# EAGLE board esp-4relay-board (EAGLE 7.7.0)
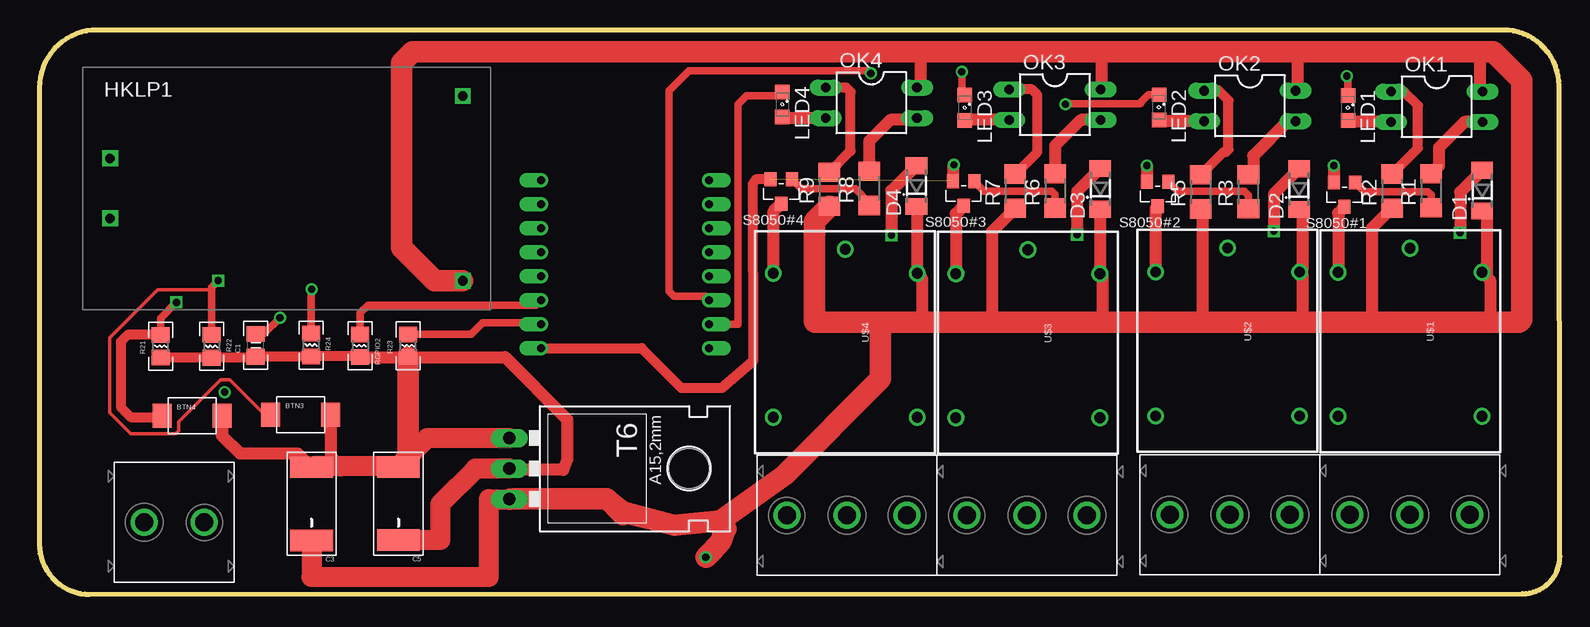
[diagram p0: board, top side]
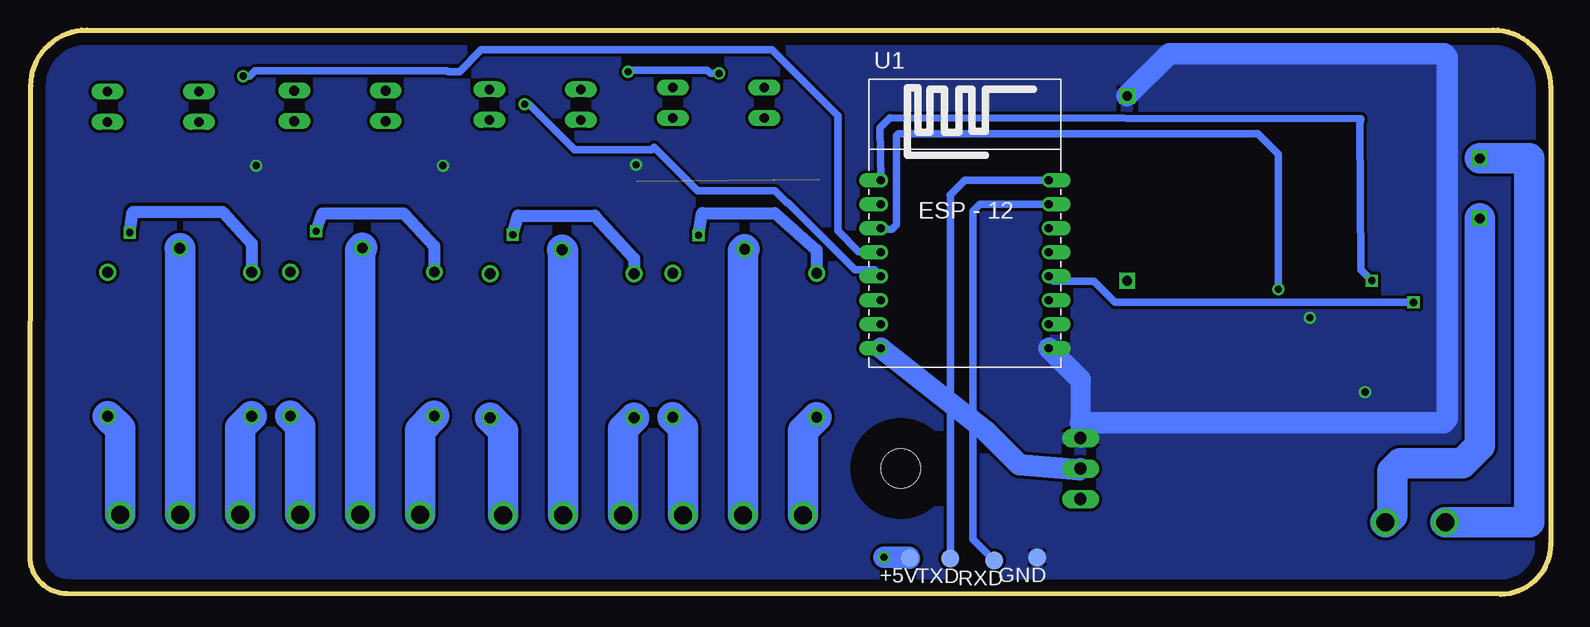
[diagram p1: board, bottom side, seen from below]

Size 126.75 x 47.03 mm. Coordinates in mm from the lower left corner, seen from the top.
Outline: 0,42.22 0,4.19 arc90 4.19,0 123.65,0.06 arc90 126.75,3.16 126.68,42.37 arc90 122.02,47.03 4.81,47.03 arc90 0,42.22
Copper layers (1*16): Top 0.035mm / dielectric 1.5mm / Bottom 0.035mm
Design rules "default": minimum track width 10mil, minimum drill 24mil, track to track 8mil, track to pad 8mil, pad to pad 8mil, via to via 8mil, smd to smd 8mil, copper to edge 40mil, drill to drill 8mil, minimum pad ring 10mil, minimum via ring 8mil, stop-mask expansion 4mil, vias tented up to drill 0mil, thermal gap 10mil
Net classes: 0 default: width 0.305 mm, drill 0.508 mm, clearance 0.254 mm; 1 VCC: width 0.457 mm, clearance 0.254 mm

## Footprints (pad centres in the part's own frame; a part is rotated, then mirrored left to right if it is on the bottom)
TP15R = smd 1.5 x 1.5: TP 0,0
2P-SWITCH-TURTLE = smd 1.6 x 2: 1 -0.5,-1.5; 2 4.5,-1.5
C_0805 = smd 1.3 x 1.5: 1 -0.95,0; 2 0.95,0
VISHAY_C = smd 3.556 x 1.778: + 0,3.048; - 0,-3.048
SOD80_DO213AA_MINIMELF = smd 1.4 x 1.8: A 1.7,0; C -1.7,0
HKLPM01 = drill 0.8 square: P$1 -14.7,2.5; P$2 -14.7,-2.5; P$3 14.7,7.7; P$4 14.7,-7.7
SML0805 = smd 1.2 x 1.2: A 1.05,0; C -1.05,0
DIL04 = drill 0.813 long: 1 -1.27,-3.81; 2 1.27,-3.81; 3 1.27,3.81; 4 -1.27,3.81
R1206 = smd 1.6 x 1.803: 1 -1.422,0; 2 1.422,0
R_0805 = smd 1.3 x 1.5: 1 -0.95,0; 2 0.95,0
SOT-23 = smd 1.016 x 1.143: 1 -0.889,-1.016; 2 0.889,-1.016; 3 0,1.016
EK500V-03P = drill 1.5: P$1 0,0; P$2 5,0; P$3 10,0
EK500V-02P = drill 1.5: P$1 0,0; P$2 5,0
78XXL = drill 1.016 long: GND 0,-3.81; IN -2.54,-3.81; OUT 2.54,-3.81 | hole 3.302: 0,11.176
ESP12 = drill 0.7 offset: ADC -7.1,3.8; CH_PD -7.1,1.8; GND 6.9,-8.2; GPIO0 6.9,-2.2; GPIO2 6.9,-4.2; GPIO4 6.9,1.8; GPIO5 6.9,-0.2; GPIO12 -7.1,-4.2; GPIO13 -7.1,-6.2; GPIO14 -7.1,-2.2; GPIO15 6.9,-6.2; GPIO16 -7.1,-0.2; RESET -7.1,5.8; RX 6.9,3.8; TX 6.9,5.8; VCC -7.1,-8.2
SRD-05VDC-SL-C = drill 0.9: COIL0 -5.39,-6.12; COIL1 -5.39,5.88; SWCLOSED 6.61,-6.12; SWCOMMON -7.39,-0.12; SWOPEN 6.61,5.88

## Placement (x,y rotation side)
+5V  TPTP15R  [TP15R]  53.44,3.03 180 bottom
BTN3  [2P-SWITCH-TURTLE]  19.79,16.48 0 top
BTN4  [2P-SWITCH-TURTLE]  10.73,16.38 0 top
C1  100n  [C_0805]  18.05,20.75 90 top
C3  10uF  [VISHAY_C]  22.7,7.54 180 top
C5  100uF  [VISHAY_C]  29.94,7.57 180 top
D1  LL4148  [SOD80_DO213AA_MINIMELF]  120.28,33.66 90 top
D2  LL4148  [SOD80_DO213AA_MINIMELF]  105.01,33.77 90 top
D3  LL4148  [SOD80_DO213AA_MINIMELF]  88.44,33.8 90 top
D4  LL4148  [SOD80_DO213AA_MINIMELF]  73.12,34.03 90 top
GND  TPTP15R  [TP15R]  42.78,3.06 180 bottom
HKLP1  HKLPM01  [HKLPM01]  20.6,33.84 0 top
LED1  [SML0805]  109.09,40.54 270 top
LED2  [SML0805]  93.33,40.59 270 top
LED3  [SML0805]  77.15,40.55 270 top
LED4  [SML0805]  61.94,40.82 270 top
OK1  PC817  [DIL04]  116.48,40.63 270 top
OK2  PC817  [DIL04]  100.92,40.7 270 top
OK3  PC817  [DIL04]  84.66,40.8 270 top
OK4  PC817  [DIL04]  69.36,40.96 270 top
R1  [R1206]  116.02,33.63 90 top
R2  [R1206]  112.76,33.61 90 top
R3  [R1206]  100.78,33.55 90 top
R5  [R1206]  96.81,33.54 90 top
R6  [R1206]  84.67,33.62 90 top
R7  [R1206]  81.36,33.6 90 top
R8  [R1206]  69.17,33.83 90 top
R9  [R1206]  65.86,33.77 90 top
R21  10K  [R_0805]  10.11,20.68 90 top
R22  10K  [R_0805]  14.36,20.67 270 top
R23  10K  [R_0805]  30.73,20.71 90 top
R24  10K  [R_0805]  22.64,20.78 270 top
RGPIO2  10K  [R_0805]  26.76,20.71 270 top
RXD  TPTP15R  [TP15R]  46.38,2.81 180 bottom
S8050#1  S8050  [SOT-23]  108.79,33.31 180 top
S8050#2  S8050  [SOT-23]  93.23,33.37 180 top
S8050#3  S8050  [SOT-23]  77.05,33.41 180 top
S8050#4  S8050  [SOT-23]  61.84,33.57 180 top
T1  ST03-5MM  [EK500V-03P]  109.25,6.65 0 top
T2  ST02-5MM  [EK500V-02P]  13.75,6 180 top
T3  ST03-5MM  [EK500V-03P]  94.23,6.64 0 top
T4  ST03-5MM  [EK500V-03P]  77.31,6.58 0 top
T5  ST03-5MM  [EK500V-03P]  62.31,6.59 0 top
T6  LM1117  [78XXL]  42.99,10.49 270 top
TXD  TPTP15R  [TP15R]  50.04,3 180 bottom
U1  [ESP12]  48.72,28.71 0 bottom
U$1  RELAYPTH  [SRD-05VDC-SL-C]  114.39,21.46 270 top
U$2  RELAYPTH  [SRD-05VDC-SL-C]  99.17,21.48 270 top
U$3  RELAYPTH  [SRD-05VDC-SL-C]  82.52,21.33 270 top
U$4  RELAYPTH  [SRD-05VDC-SL-C]  67.3,21.37 270 top

## Library data of the parts
+5V GND RXD TXD = testpad
BTN3 BTN4 = PRT-Switch
C1 R21-R24 RGPIO2 = PRT-RCL
C3 C5 = SparkFun-Passives
D1-D4 = _hhn_diodes_smd
HKLP1 = HKLPM01
LED1-LED4 = led
OK1-OK4 = optocoupler-2
R1-R3 R5-R9 = resistor
S8050#1-S8050#4 = Seeed-Transistor-2016; MPN: S8050
T1-T5 = con-dinkle
T6 = SparkFun-PowerIC
U1 = esp8266modules
U$1-U$4 = SRD-05VDC-SL-C

## Nets
+3V3 [VCC]: C1.1 C5.+ R21.1 R22.2 R24.2 RGPIO2.2 T6.GND U1.VCC
+5V [VCC]: +5V.TP C3.+ D1.C D2.C D3.C D4.C HKLP1.P$4 OK1.4 OK2.4 OK3.4 OK4.4 R2.1 R5.1 R7.1 R9.1 T6.OUT U$1.COIL1 U$2.COIL1 U$3.COIL1 U$4.COIL1
CH_PD: R24.1 U1.CH_PD
GND: BTN3.2 BTN4.2 C1.2 C3.- C5.- GND.TP HKLP1.P$3 R23.1 S8050#1.2 S8050#2.2 S8050#3.2 S8050#4.2 T6.IN U1.GND
GPIO0: BTN4.1 R21.2 U1.GPIO0
GPIO2: RGPIO2.1 U1.GPIO2
GPIO12: LED3.C U1.GPIO12
GPIO13: LED4.C U1.GPIO13
GPIO14: LED2.C U1.GPIO14
GPIO15: R23.2 U1.GPIO15
GPIO16: LED1.C U1.GPIO16
N$1: OK1.3 R1.2
N$2: R1.1 S8050#1.1
N$3: T1.P$2 U$1.SWCOMMON
N$4: D1.A S8050#1.3 U$1.COIL0
N$7: OK1.1 R2.2
N$8: LED1.A OK1.2
N$9: T1.P$3 U$1.SWOPEN
N$10: T1.P$1 U$1.SWCLOSED
N$16: HKLP1.P$1 T2.P$2
N$17: HKLP1.P$2 T2.P$1
N$18: D2.A S8050#2.3 U$2.COIL0
N$20: OK2.3 R3.2
N$21: R3.1 S8050#2.1
N$22: OK2.1 R5.2
N$23: LED2.A OK2.2
N$24: T3.P$2 U$2.SWCOMMON
N$25: T3.P$3 U$2.SWOPEN
N$26: T3.P$1 U$2.SWCLOSED
N$27: D3.A S8050#3.3 U$3.COIL0
N$29: OK3.3 R6.2
N$30: R6.1 S8050#3.1
N$31: OK3.1 R7.2
N$32: LED3.A OK3.2
N$33: T4.P$2 U$3.SWCOMMON
N$34: T4.P$3 U$3.SWOPEN
N$35: T4.P$1 U$3.SWCLOSED
N$36: D4.A S8050#4.3 U$4.COIL0
N$38: OK4.3 R8.2
N$39: R8.1 S8050#4.1
N$40: OK4.1 R9.2
N$41: LED4.A OK4.2
N$42: T5.P$2 U$4.SWCOMMON
N$43: T5.P$3 U$4.SWOPEN
N$44: T5.P$1 U$4.SWCLOSED
RST: BTN3.1 R22.1 U1.RESET
RXD: RXD.TP U1.RX
TXD: TXD.TP U1.TX

## Tracks (layer width: path | path; a pad name or v marks a point on that pad's centre or on a via)
+3V3
  Top 0.813: RGPIO2.2 26.7,19.82 R24.2 22.62,19.8 C1.1 17.96,19.72 R22.2 R21.1
  Top 1.016: RGPIO2.2 38.8,19.77 44.01,14.56 44.01,11.24 43.67,10.38 39.59,10.38 T6.GND
  Top 1.676: T6.GND 36.36,10.49 33.42,7.54 33.42,4.52 C5.+
  Bottom 1.778: U1.VCC 47.15,13.69 44.26,10.79 39.29,10.37 T6.GND
+5V  (via drill 0.61)
  Top 0.457: 70.12,21.89 70.12,22.67
  Top 1.016: 73.56,22.67 73.56,26.37 U$4.COIL1 73.18,32.27 D4.C | 88.6,22.67 88.6,26.52 U$3.COIL1 88.4,32.05 D3.C | U$2.COIL1 105.28,26.64 | 105.28,26.64 105.28,22.67 | U$1.COIL1 120.64,26.47 | 120.64,26.47 120.93,26.18 120.93,22.67 | OK1.4 120.13,42.07 120.13,45.22 | OK2.4 104.91,42.16 104.91,45.22 | OK3.4 88.57,42.18 88.57,45.22 | OK4.4 73.48,42.55 73.48,45.22 | D2.C 105.28,31.8 105.28,26.64 | D1.C 120.47,31.76 120.68,31.76 120.64,31.72 120.64,26.47 | R2.1 112.66,32.09 112.66,32.08 111.09,30.51 111.09,22.67 | R5.1 96.94,31.99 96.94,22.67 | R7.1 79.39,30.21 79.39,22.67 | 64.62,22.72 64.67,22.67
  Top 1.676: C3.+ 22.7,1.46 37.47,1.46 37.47,7.94 T6.OUT
  Top 1.778: R9.1 64.62,31.1 64.62,22.72 | 64.67,22.67 70.12,22.67 73.56,22.67 79.39,22.67 88.6,22.67 96.94,22.67 105.28,22.67 111.09,22.67 120.93,22.67 123.35,22.67 123.57,22.89 123.57,42.85 121.2,45.22 120.13,45.22 104.91,45.22 88.57,45.22 73.48,45.22 31.12,45.22 30.2,44.3 30.2,28.88 32.95,26.14 HKLP1.P$4 | 70.12,21.89 70.12,17.95 62.1,9.93 56.8,6.15 | 52.94,5.75 48.76,6.8 47.29,7.98 | 47.29,7.98 39.54,7.98 T6.OUT | 47.29,7.98 47.93,7.35 48.67,6.62 48.7,6.89 52.94,5.75 | 52.94,5.75 56.8,6.15 | 56.8,6.15 57.24,5.47 57.08,5.19 56.81,4.44 56.08,3.61 v55.56,3.09
  Bottom 0.457: 53.37,3.14 +5V.TP
  Bottom 1.778: v55.56,3.09 53.5,3.09 +5V.TP
CH_PD  (via drill 0.6)
  Top 0.61: R24.1 22.64,25.36 v22.7,25.42
  Bottom 0.61: v22.7,25.42 22.7,36.69 24.39,38.38 54.37,38.38 54.53,38.22 54.53,30.79 54.9,30.42 55.73,30.42 U1.CH_PD
GND  (via drill 0.6)  (1 unrouted)
  Top 0.61: C1.2 18.71,21.7 v20.06,23.05
  Top 0.813: S8050#4.2 59.74,34.59 59.47,34.21 59.53,19.47 56.89,17.21 53.5,17.21 50.2,20.51 U1.GND
  Top 1.016: v76.23,35.81 76.16,35.74 S8050#3.2 | v92.33,35.73 v92.34,35.72 S8050#2.2 | v107.9,35.73 S8050#1.2 | BTN4.2 15.23,13.23 16.72,11.74 21.55,11.74 C3.- | BTN3.2 24.29,11.52 25.13,10.67
  Top 1.676: T6.IN 32.34,13.03 30.41,11.1 C5.- 29.83,10.62 29.78,10.67 25.13,10.67 22.77,10.67 C3.-
  Top 1.778: R23.1 30.73,11.42 30.41,11.1
  Bottom 1.676: 39.18,17.87 39.18,14.32 T6.IN
  Bottom 1.778: U1.GND 39.18,17.87 | HKLP1.P$3 31.8,45.04 8.84,45.04 8.61,44.74 8.61,14.62 8.91,14.32 39.18,14.32
  other vias: 15.46,16.86
  pour Bottom: -2.14,47.99 -2.14,-1.74 -1.1,-2.78 128.1,-2.78 128.35,-3.03 131.46,0.08 131.46,45.27 125.25,51.48 0.84,51.48 -2.14,48.5
GPIO0  (via drill 0.6)
  Top 0.61: R21.2 10.11,23.03 v11.42,24.33
  Top 0.813: R21.2 7.34,21.62 6.79,21.07 6.79,15.61 7.63,14.77 10.13,14.77 BTN4.1
  Bottom 0.61: v11.42,24.33 36.33,24.33 38.08,26.08 41.39,26.08 U1.GPIO0
GPIO2
  Top 0.61: RGPIO2.1 26.76,23.47 27.39,24.1 41.41,24.1 U1.GPIO2
GPIO12  (via drill 0.6)
  Top 0.305: 55.62,24.64 U1.GPIO12
  Top 0.61: U1.GPIO12 55.49,24.84 52.9,24.84 52.48,25.26 52.48,41.96 54.17,43.65 69.07,43.65 v69.31,43.41 | v76.89,43.54 76.89,41.86 LED3.C
  Bottom 0.61: v69.31,43.41 70.04,43.41 70.32,43.69 76.74,43.69 v76.89,43.54
GPIO13
  Top 0.61: U1.GPIO13 58.24,22.51 58.26,22.49 58.26,40.85 58.95,41.54 61.61,41.54 LED4.C
GPIO14  (via drill 0.6)
  Top 0.61: LED2.C 92.47,41.63 91.82,40.99 91.82,40.93 91.76,40.87 85.55,40.87 v85.52,40.84
  Bottom 0.61: v85.52,40.84 85.13,40.84 81.35,37.06 74.94,37.06 74.75,37.25 74.73,37.25 71.12,33.64 64.66,33.64 63.65,32.63 63.58,32.63 58,27.05 56.36,27.05 U1.GPIO14
GPIO15
  Top 0.61: R23.2 36,21.66 36.96,22.62 41.71,22.62 U1.GPIO15
GPIO16  (via drill 0.6)
  Top 0.61: LED1.C 109.09,43.09 v108.99,43.19
  Bottom 0.61: v108.99,43.19 108.45,43.19 108,43.64 91.99,43.64 91.92,43.57 90.96,43.57 89.16,45.37 87.89,45.37 87.87,45.39 64.9,45.39 59.41,39.9 59.41,30.3 57.68,28.57 55.88,28.57 U1.GPIO16
N$1
  Top 1.016: OK1.3 118.81,39.37 116.67,37.22 116.67,35.7 R1.2
N$2
  Top 0.61: S8050#1.1 110.44,33.57 115.75,33.57 116.02,33.3 R1.1
N$3
  Bottom 2.54: U$1.SWCOMMON 114.25,28.82 T1.P$2
N$4  (via drill 0.6)
  Top 1.016: S8050#1.3 108.27,31.77 U$1.COIL0 | D1.A 118.43,33.51 v118.43,30.15
  Bottom 1.016: v118.43,30.15 118.19,31.88 110.71,31.88 108.27,29.23 U$1.COIL0
N$7
  Top 0.813: R2.2 114.91,37.18 114.91,40.75 113.76,41.91 OK1.1
N$8
  Top 1.016: OK1.2 109.09,39.37 LED1.A
N$9
  Bottom 2.54: U$1.SWOPEN 119.25,13.83 T1.P$3
N$10
  Bottom 2.54: U$1.SWCLOSED 109.25,13.87 T1.P$1
N$16
  Bottom 2.54: T2.P$2 1.76,6 1.76,30.87 1.77,36.34 HKLP1.P$1
N$17
  Bottom 2.54: T2.P$1 13.19,6.56 13.19,10.26 12.54,10.91 7.37,10.91 5.9,12.38 HKLP1.P$2
N$18  (via drill 0.6)
  Top 1.016: S8050#2.3 93.05,32.17 U$2.COIL0 | D2.A 102.91,33.38 v102.91,30.26
  Bottom 1.016: v102.91,30.26 102.39,31.75 95.59,31.75 93.05,29.02 U$2.COIL0
N$20
  Top 1.016: OK2.3 104.05,39.44 101.18,36.57 101.18,35.37 R3.2
N$21
  Top 0.61: S8050#2.1 94.91,33.59 100.46,33.59 100.78,33.27 R3.1
N$22
  Top 0.813: R5.2 98.74,36.88 98.94,36.88 99.12,37.06 99.12,41.17 98.31,41.98 OK2.1
N$23
  Top 1.016: OK2.2 93.33,39.44 LED2.A
N$24
  Bottom 2.54: U$2.SWCOMMON 99.23,28.68 T3.P$2
N$25
  Bottom 2.54: U$2.SWOPEN 104.23,14.05 T3.P$3
N$26
  Bottom 2.54: U$2.SWCLOSED 94.23,13.68 T3.P$1
N$27  (via drill 0.6)
  Top 1.016: S8050#3.3 76.4,31.73 U$3.COIL0 | D3.A 86.51,33.56 v86.51,29.97
  Bottom 1.016: v86.51,29.97 86.07,31.57 79.68,31.57 76.4,27.98 U$3.COIL0
N$29
  Top 1.016: OK3.3 86.84,39.54 84.67,37.37 R6.2
N$30
  Top 0.61: S8050#3.1 78.76,33.6 84.42,33.6 84.67,33.36 R6.1
N$31
  Top 0.813: R7.2 83.19,36.85 83.19,41.62 82.73,42.08 OK3.1
N$32
  Top 1.016: OK3.2 77.15,39.54 LED3.A
N$33
  Bottom 2.54: U$3.SWCOMMON 82.31,28.64 T4.P$2
N$34
  Bottom 2.54: U$3.SWOPEN 87.31,13.64 T4.P$3
N$35
  Bottom 2.54: U$3.SWCLOSED 77.31,13.8 T4.P$1
N$36  (via drill 0.6)
  Top 1.016: S8050#4.3 61.17,31.88 U$4.COIL0 | D4.A 71.03,33.65 v71.03,29.93
  Bottom 1.016: v71.03,29.93 70.73,31.77 64.67,31.77 61.17,28.7 U$4.COIL0
N$38
  Top 1.016: OK4.3 73.02,39.54 70.94,39.54 69.17,37.77 R8.2
N$39
  Top 0.61: S8050#4.1 63.52,33.8 68.02,33.8 69.17,32.66 R8.1
N$40
  Top 0.813: R9.2 67.63,36.96 67.63,41.88 67.28,42.23 OK4.1
N$41
  Top 1.016: OK4.2 61.94,39.69 LED4.A
N$42
  Bottom 2.54: U$4.SWCOMMON 67.31,28.62 T5.P$2
N$43
  Bottom 2.54: U$4.SWOPEN 72.31,13.89 T5.P$3
N$44
  Bottom 2.54: U$4.SWCLOSED 62.31,13.62 T5.P$1
RST  (via drill 0.6)
  Top 0.305: 14.36,25.39 9.87,25.39 5.87,21.39 5.87,15.14 7.62,13.39 11.37,13.39 11.62,13.64 11.62,14.39 15.12,17.89 15.87,17.89 18.62,15.14 19.12,15.14 BTN3.1
  Top 0.61: R22.1 14.36,25.39 14.36,25.61 v14.9,26.15
  Bottom 0.61: U1.RESET 55.9,38.88 55.06,39.73 15.82,39.65 15.89,39.27 15.81,27.06 v14.9,26.15
RXD
  Bottom 0.61: U1.RX 47.57,32.51 48.16,31.92 48.16,4.59 RXD.TP
TXD
  Bottom 0.61: U1.TX 48.82,34.51 50.05,33.28 50.04,33.27 TXD.TP